# Altium PCB Dimming_IR_VLC.PcbDoc
Units mm, origin at the board's own origin, x right, y up, seen from the top; angles counter-clockwise.
Board outline 48.06 x 54.61 mm, 2 copper layers (Top Layer, Bottom Layer); 43 components, 43 nets, 179 pads, 19 vias.
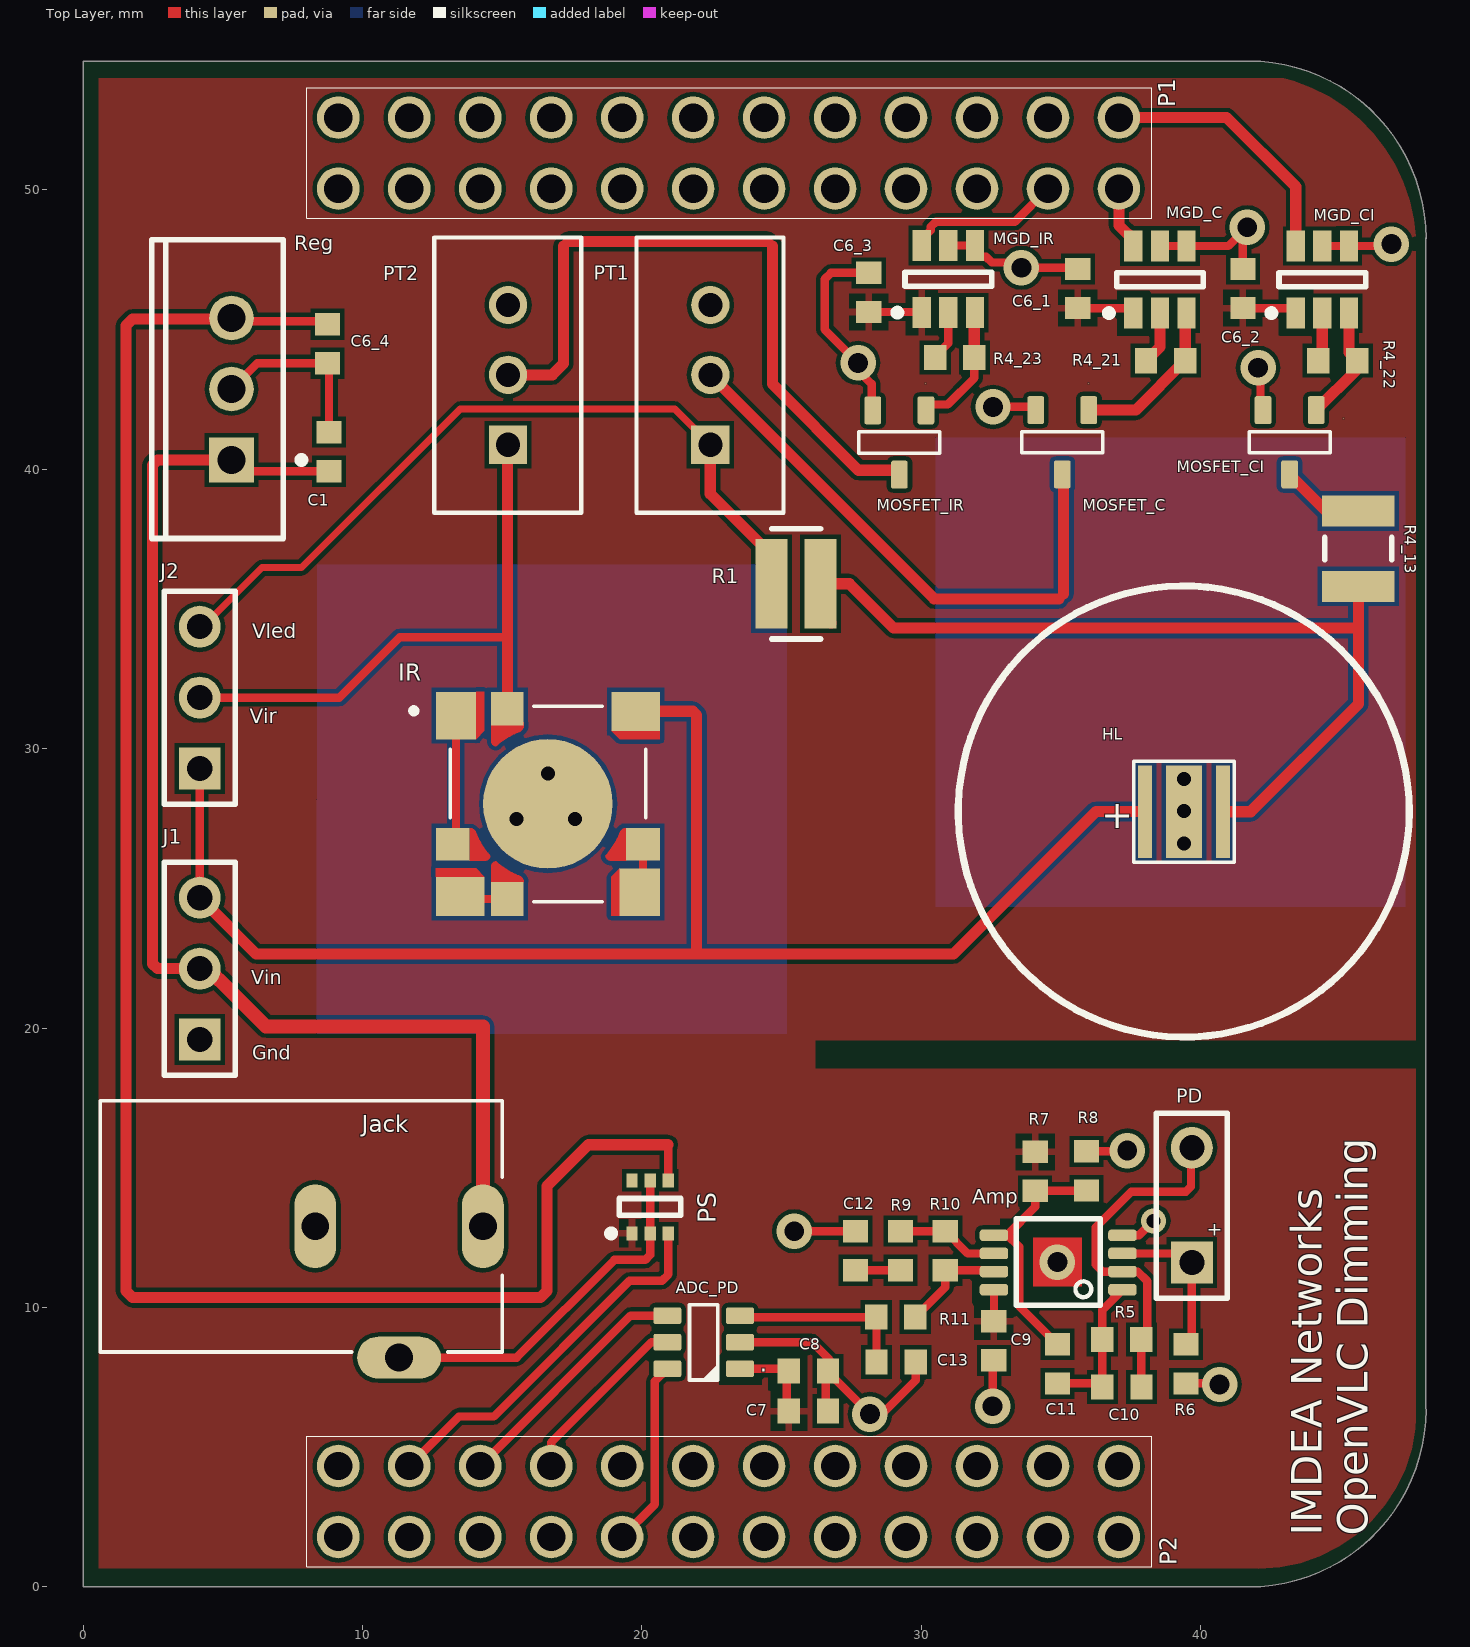
[diagram p0: Top Layer view]
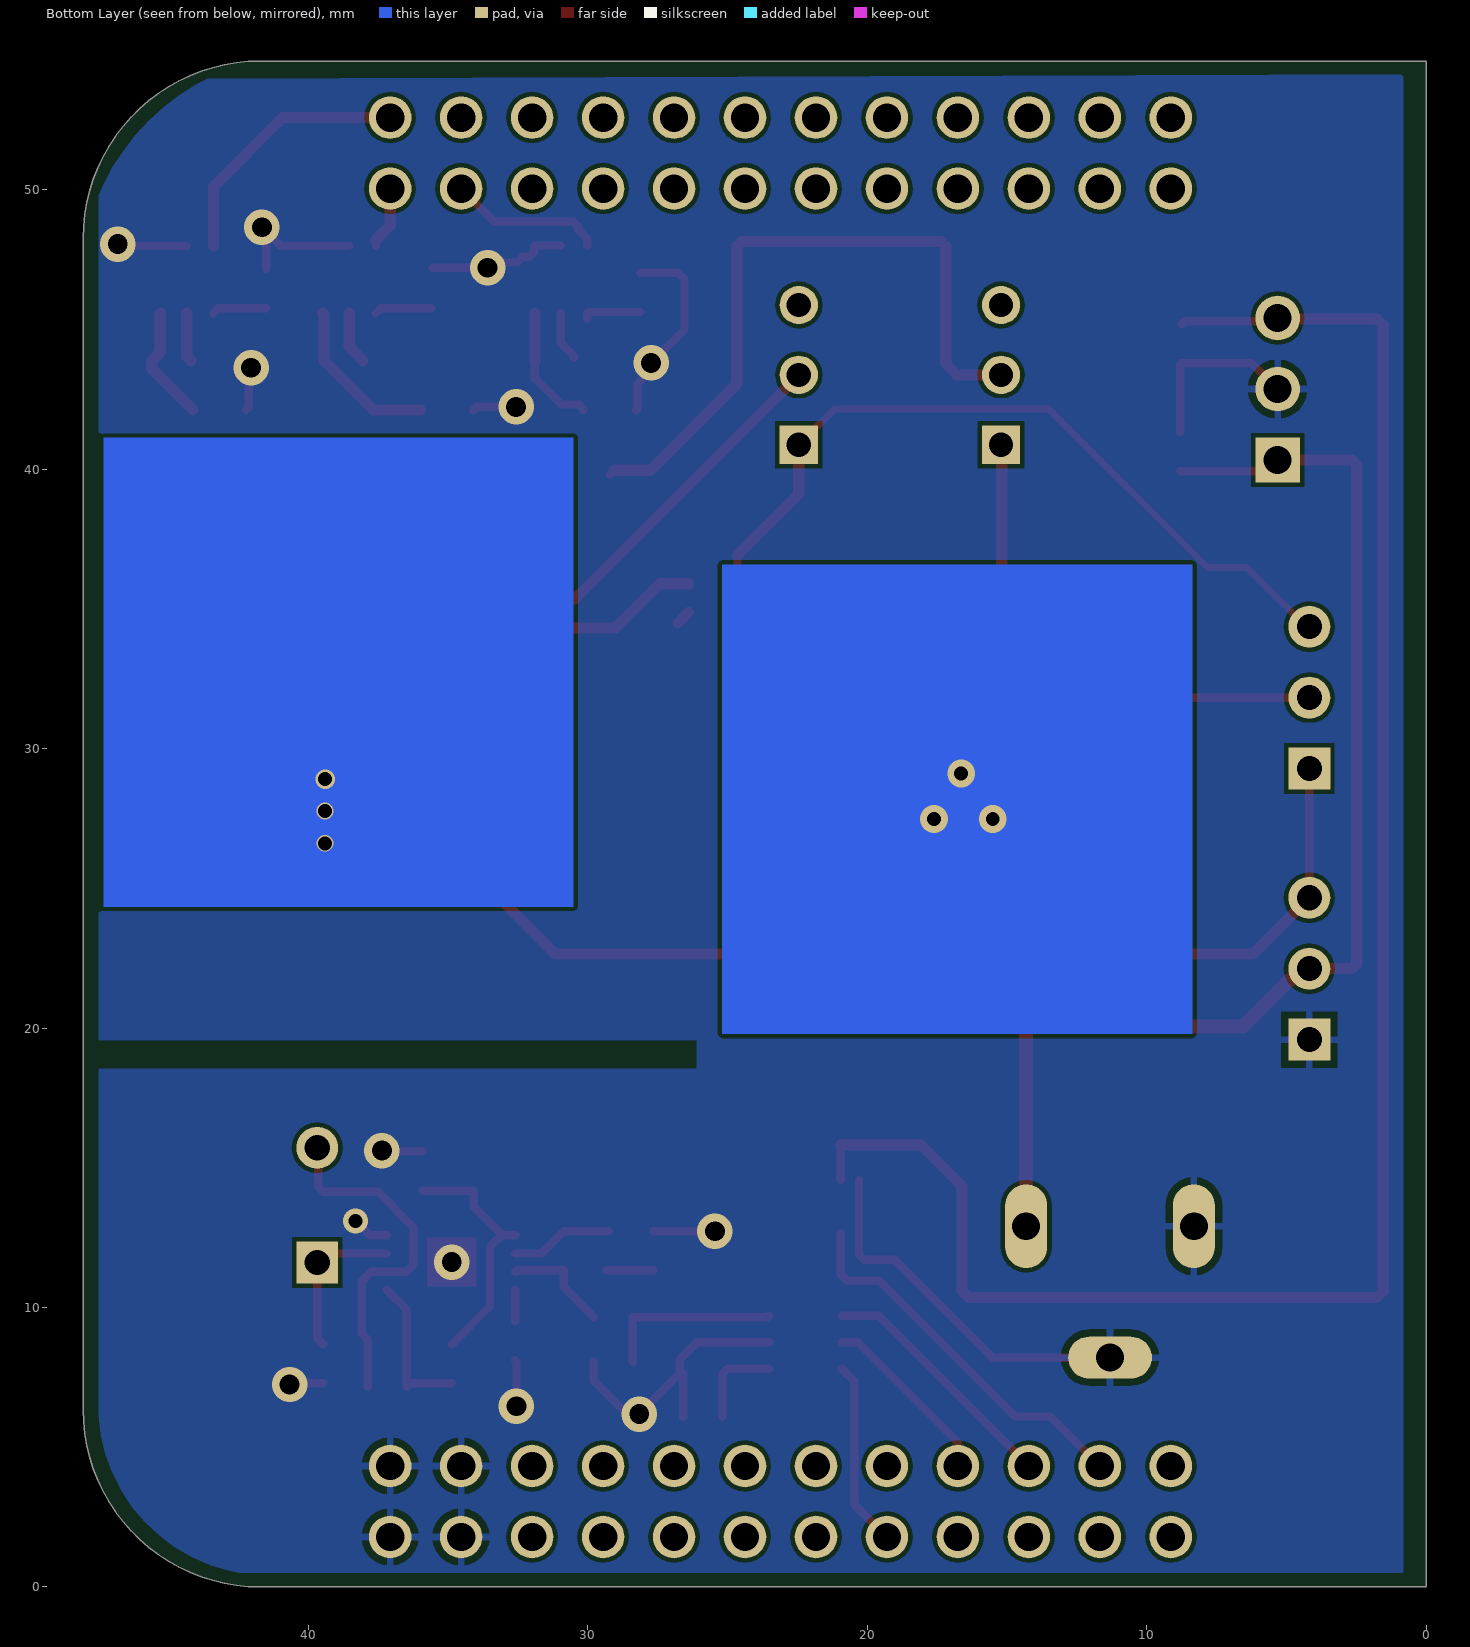
[diagram p1: Bottom Layer view, seen from below]

## Layer stack, top to bottom
Top Solder: solder mask 0.0102, Solder Resist, Dk 3.5
Top Layer: signal copper 0.0356
Dielectric1: dielectric 0.32, FR-4, Dk 4.8
Bottom Layer: signal copper 0.0356
Bottom Solder: solder mask 0.0102, Solder Resist, Dk 3.5

## Board outline
0.002,-0.003 0.002,54.607 41.716,54.607 cw(c41.716,48.257) 48.066,48.257 48.065,48.292 48.065,6.382 48.066,6.347 cw(c41.716,6.347) 41.716,-0.003

## Design rules (kind name [scope] priority, off if disabled: settings)
Clearance Clearance_1 [(InNet('GND') AND InComponent('DC-DC'))] p1: gap=0.5 ignorepadtopadclearanceinfootprint=TRUE except(0: Arc-Hole Track-Hole SMDPad-Hole THPad-Hole Via-Hole Fill-Hole Poly-Hole Region-Hole Text-Hole)
Clearance [All] p2: gap=0.15 ignorepadtopadclearanceinfootprint=FALSE except(0: Arc-Hole Track-Hole SMDPad-Hole THPad-Hole Via-Hole Fill-Hole Poly-Hole Region-Hole Text-Hole)
DiffPairsRouting [All] p1: maxlimit=0.3 minlimit=0.3 mostfreqgap=0.3 toplayer_minwidth=0.381 toplayer_maxwidth=0.381 toplayer_prefwidth=0.381 bottomlayer_minwidth=0.381 bottomlayer_maxwidth=0.381 bottomlayer_prefwidth=0.381 maxuncoupledlength=12.7
HoleSize [All] p1: absolutevalues=TRUE maxlimit=2.54 minlimit=0.25 maxpercent=80.000 minpercent=20.000
HoleToHoleClearance [All] p1: gap=0.1 allowstackedmicrovias=TRUE
MinimumSolderMaskSliver [All] p1: minsoldermaskwidth=0.02
PolygonConnect PolygonConnect_1 [IsVia & InNet('GND')] p1: connectstyle=Direct reliefconductorwidth=0.254 reliefentries=4 polygonreliefangle="90 Angle" airgapwidth=0
PolygonConnect [All] p2: connectstyle=Relief reliefconductorwidth=0.254 reliefentries=4 polygonreliefangle="90 Angle" airgapwidth=0.254
RoutingVias [All] p1: holewidth=0.711 width=1.27 viastyle="Through Hole" minholewidth=25 minwidth=0.55 maxholewidth=0.711 maxwidth=1.27
SMDNeckDown [All] p1: percent=80.000
SilkToSilkClearance [All] p1: silktosilkclearance=0.15
SilkToSolderMaskClearance [IsPad] p1: minsilkscreentomaskgap=0.05 clearancetoexposedcopper=TRUE
SolderMaskExpansion [All] p1: expansion=0.102 istentingtop=FALSE
Width [All] p1: maxlimit=0.5 minlimit=0.15 preferedwidth=0.3 minimp=50.000000 maximp=50.000000 favimp=50.000000
24 further rules are at their usual default settings.

## Classes and differential pairs
component class OpenVLC_1.3.7: ADC_PD Amp C7 C8 C10 C11 HL Jack MOSFET_C PT1 PT2 R5 R6 R7 R10 R11

## Components (designator, comment, footprint, x,y, rotation, side; value= is the part's Value field where it differs from the comment)
ADC_PD "ADC_PD" SOT23-6 22.214,8.756 r180 top
Amp "LTC6269-10" MSOP8 34.903,11.607 r180 top (schematic designator LTC6269-11)
C1 "Cap" 1608[0603] 8.806,40.628 r90 top
C6_1 "Cap" 1608[0603] 35.603,46.467 r90 top (schematic designator C6_2)
C6_2 "Cap" 1608[0603] 41.51,46.467 r90 top (schematic designator C6_1)
C6_3 "Cap" 1608[0603] 28.121,46.327 r90 top
C6_4 "Cap" 1608[0603] 8.752,44.488 r90 top
C7 "Cap" 1608[0603] 25.964,6.29 r0 top
C8 "Cap" 1608[0603] 25.964,7.721 r0 top
C9 "Cap" 1608[0603] 32.598,8.805 r90 top
C10 "Cap" 1608[0603] 37.184,7.153 r180 top
C11 "Cap" 1608[0603] 34.872,7.98 r90 top
C12 "Cap" 1608[0603] 27.652,12.03 r270 top (schematic designator C13)
C13 "Cap" 1608[0603] 29.1,8.052 r0 top
HL "High Power LED" LEDM345X345X226 39.405,27.74 r0 top
IR "Comment" LED_LZ4-04MDCA-0000 16.639,28.023 r0 top locked
J1 "Comment" HDR1X3 4.179,19.584 r90 top
J2 "Comment" HDR1X3 4.179,29.285 r90 top
Jack "2.0 mm Center Pin, 2.5 A, Right Angle, Through Hole, Tapered Pins, Dc Power Jack Connector" CUI_PJ-102A 11.312,12.904 r90 top (schematic designator J1)
MGD_C "LM5114B" SOT23-6_N 38.54,46.787 r90 top (schematic designator MGD_CI)
MGD_CI "LM5114B" SOT23-6_N 44.355,46.787 r90 top (schematic designator MGD_C)
MGD_IR "LM5114B" SOT23-6_N 30.969,46.805 r90 top
MOSFET_C "MOSFET" SOT23-3 35.049,40.965 r270 top (schematic designator MOSFET_CI)
MOSFET_CI "MOSFET" SOT23-3 43.184,40.965 r270 top (schematic designator MOSFET_C)
MOSFET_IR "MOSFET" SOT23-3 29.217,40.956 r270 top
P1 "BBB_P8_reduced" BBB_CAPE_NO_HEADER_R_24 -18.804,50.044 r180 top
P2 "BBB_P9_reduced" BBB_CAPE_NO_HEADER_R_24 -18.804,1.784 r180 top
PS "Comment" ONSC-SOT-363-6-419B-02_W_V 20.299,13.599 r90 top
PT1 "Comment" POT_PV36W_MUR 22.451,40.876 r90 top
PT2 "Comment" POT_PV36W_MUR 15.213,40.876 r90 top
R1 "Comment" FP-LTR18-MFG 25.52,35.897 r0 top
R4_13 "Res3" 14-1210 45.645,37.156 r90 top
R4_21 "Res1" 1608[0603] 38.747,43.882 r180 top (schematic designator R4_22)
R4_22 "Res1" 1608[0603] 44.908,43.882 r180 top (schematic designator R4_21)
R4_23 "Res1" 1608[0603] 31.203,43.996 r180 top
R5 "Res1" 1608[0603] 37.18,8.856 r180 top
R6 "Res1" 1608[0603] 39.472,7.98 r90 top
R7 "Res1" 1608[0603] 34.079,14.87 r90 top
R8 "Res1" 1608[0603] 35.918,14.885 r270 top
R9 "Res1" 1608[0603] 29.257,12.03 r270 top
R10 "Res1" 1608[0603] 30.861,12.03 r90 top
R11 "Res1" 1608[0603] 29.09,9.654 r0 top
Reg "Comment" NDE0003A 5.314,42.869 r90 top

## Footprints (in the part's own frame and the unit in brackets; to place one, negate y for a bottom-side part, rotate by r counter-clockwise, add the part's x,y. Pads: shape width x height; smd on the part's side, far side on the other; paste and mask are expansions set on the pad)
14-1210 [mm] "Chip Resistor, Body 3.2x2.5mm, IPC High Density"
  rect 1.1x2.6 smd: 1(-1.35,0) 2(1.35,0)
  silkscreen extent -0.4,-1.2 0.4,1.2, body extent -1.68,-1.32 1.68,1.32, height 0.9
1608[0603] [mm] "Chip Capacitor, Body 1.6x0.8mm, IPC High Density"
  rect 0.8x0.9 smd: 1(-0.7,0) 2(0.7,0)
  body extent -0.87,-0.48 0.87,0.48, height 1.3
BBB_CAPE_NO_HEADER_R_24 [mil] "46-pin male header for BeagleBone Black P8,P9"
  round 60 hole 40: 23(-1100,0) 24(-1100,-100) 25(-1200,0) 26(-1200,-100) 27(-1300,0) 28(-1300,-100) 29(-1400,0) 30(-1400,-100) 31(-1500,0) 32(-1500,-100) 33(-1600,0) 34(-1600,-100) 35(-1700,0) 36(-1700,-100) 37(-1800,0) 38(-1800,-100) 39(-1900,0) 40(-1900,-100) 41(-2000,0) 42(-2000,-100) 43(-2100,0) 44(-2100,-100) 45(-2200,0) 46(-2200,-100)
  silkscreen extent -2246,-142 -1056,42
CUI_PJ-102A [mm]
  oval 3x1.5 hole 1: 1(0,-3) 2(0,3)
  oval 1.5x3 hole 1: 3(-4.7,0)
  silkscreen extent -4.5,-3.7 4.5,10.7
FP-LTR18-MFG [mm]
  rect 1.15x3.2 smd paste+0 mask+0: 1(-0.875,0) 2(0.875,0)
  silkscreen extent -0.87,-1.97 0.87,1.97, body extent -1.55,-1.78 1.55,1.78, height 0.25
HDR1X3 [mm] "Connector; Header; 3 Position"
  rect 1.5x1.5 hole 0.9: 1(0,0)
  round 1.5 hole 0.9: 2(2.54,0) 3(5.08,0)
  silkscreen extent -1.27,-1.27 6.35,1.27
LED_LZ4-04MDCA-0000 [mm]
  rect 1.44x1.7 smd paste-2 mask+0: 1(-3.29,3.16) 5(3.29,-3.16)
  rect 1.16x1.21 smd paste-2 mask+0: 2(-1.45,3.405) 6(-1.45,-3.405)
  rect 1.74x1.4 smd paste-2 mask+0: 3(3.14,3.31) 7(-3.14,-3.31)
  rect 1.21x1.16 smd paste-2 mask+0: 4(3.405,-1.45) 8(-3.405,-1.45)
  round 4.64 smd mask+0.23: 9(0,0)
  Top Layer region: -2.27,-2.61 -4.01,-2.61 -4.01,-2.31 -2.57,-2.31
  Top Layer region: -2.732,-0.873 -2.724,-0.876 -2.716,-0.88 -2.708,-0.884 -2.7,-0.888 -2.692,-0.892 -2.685,-0.897 -2.678,-0.901 -2.67,-0.906 -2.663,-0.911 -2.656,-0.917 -2.649,-0.922 -2.643,-0.928 -2.636,-0.934 -2.63,-0.94 -2.624,-0.946 -2.618,-0.953 -2.612,-0.959 -2.607,-0.966 -2.601,-0.973 -2.596,-0.98 -2.591,-0.988 -2.587,-0.995 -2.582,-1.002 -2.578,-1.01 -2.574,-1.018 -2.57,-1.026 -2.566,-1.034 -2.563,-1.042 -2.56,-1.05 -2.548,-1.079 -2.536,-1.108 -2.523,-1.137 -2.51,-1.166 -2.497,-1.194 -2.483,-1.223 -2.469,-1.251 -2.455,-1.279 -2.44,-1.307 -2.425,-1.335 -2.41,-1.363 -2.394,-1.39 -2.378,-1.418 -2.362,-1.445 -2.345,-1.472 -2.328,-1.498 -2.311,-1.525 -2.293,-1.551 -2.276,-1.577 -2.258,-1.603 -2.239,-1.629 -2.22,-1.654 -2.201,-1.68 -2.182,-1.705 -2.162,-1.729 -2.143,-1.754 -2.122,-1.778 -2.102,-1.802 -2.081,-1.826 -2.06,-1.85 -2.06,-1.859 -2.061,-1.869 -2.062,-1.878 -2.064,-1.887 -2.066,-1.897 -2.069,-1.906 -2.072,-1.915 -2.076,-1.923 -2.08,-1.932 -2.084,-1.94 -2.089,-1.948 -2.094,-1.956 -2.1,-1.963 -2.106,-1.97 -2.113,-1.977 -2.12,-1.984 -2.127,-1.99 -2.134,-1.996 -2.142,-2.001 -2.15,-2.006 -2.158,-2.01 -2.167,-2.014 -2.175,-2.018 -2.184,-2.021 -2.193,-2.024 -2.203,-2.026 -2.212,-2.028 -2.221,-2.029 -2.231,-2.03 -2.24,-2.03 -2.8,-2.03 -2.8,-0.87 -2.74,-0.87
  Top Layer region: -2.27,2.61 -2.57,2.31 -2.57,4.01 -2.27,4.01
  Top Layer region: 2.57,-4.01 2.27,-4.01 2.27,-2.61 2.57,-2.31
  Top Layer region: -1.826,-2.081 -1.802,-2.102 -1.778,-2.122 -1.754,-2.143 -1.729,-2.162 -1.705,-2.182 -1.68,-2.201 -1.654,-2.22 -1.629,-2.239 -1.603,-2.258 -1.577,-2.276 -1.551,-2.293 -1.525,-2.311 -1.498,-2.328 -1.472,-2.345 -1.445,-2.362 -1.418,-2.378 -1.39,-2.394 -1.363,-2.41 -1.335,-2.425 -1.307,-2.44 -1.279,-2.455 -1.251,-2.469 -1.223,-2.483 -1.194,-2.497 -1.166,-2.51 -1.137,-2.523 -1.108,-2.536 -1.079,-2.548 -1.05,-2.56 -1.042,-2.563 -1.034,-2.566 -1.026,-2.57 -1.018,-2.574 -1.01,-2.578 -1.002,-2.582 -0.995,-2.587 -0.988,-2.591 -0.98,-2.596 -0.973,-2.601 -0.966,-2.607 -0.959,-2.612 -0.953,-2.618 -0.946,-2.624 -0.94,-2.63 -0.934,-2.636 -0.928,-2.643 -0.922,-2.649 -0.917,-2.656 -0.911,-2.663 -0.906,-2.67 -0.901,-2.678 -0.897,-2.685 -0.892,-2.692 -0.888,-2.7 -0.884,-2.708 -0.88,-2.716 -0.876,-2.724 -0.873,-2.732 -0.87,-2.74 -0.87,-2.8 -2.03,-2.8 -2.03,-2.24 -2.03,-2.231 -2.029,-2.221 -2.028,-2.212 -2.026,-2.203 -2.024,-2.193 -2.021,-2.184 -2.018,-2.175 -2.014,-2.167 -2.01,-2.158 -2.006,-2.15 -2.001,-2.142 -1.996,-2.134 -1.99,-2.127 -1.984,-2.12 -1.977,-2.113 -1.97,-2.106 -1.963,-2.1 -1.956,-2.094 -1.948,-2.089 -1.94,-2.084 -1.932,-2.08 -1.923,-2.076 -1.915,-2.072 -1.906,-2.069 -1.897,-2.066 -1.887,-2.064 -1.878,-2.062 -1.869,-2.061 -1.859,-2.06 -1.85,-2.06
  Top Layer region: -0.87,2.74 -0.873,2.732 -0.876,2.724 -0.88,2.716 -0.884,2.708 -0.888,2.7 -0.892,2.692 -0.897,2.685 -0.901,2.678 -0.906,2.67 -0.911,2.663 -0.917,2.656 -0.922,2.649 -0.928,2.643 -0.934,2.636 -0.94,2.63 -0.946,2.624 -0.953,2.618 -0.959,2.612 -0.966,2.607 -0.973,2.601 -0.98,2.596 -0.988,2.591 -0.995,2.587 -1.002,2.582 -1.01,2.578 -1.018,2.574 -1.026,2.57 -1.034,2.566 -1.042,2.563 -1.05,2.56 -1.079,2.548 -1.108,2.536 -1.137,2.523 -1.166,2.51 -1.194,2.497 -1.223,2.483 -1.251,2.469 -1.279,2.455 -1.307,2.44 -1.335,2.425 -1.363,2.41 -1.39,2.394 -1.418,2.378 -1.445,2.362 -1.472,2.345 -1.498,2.328 -1.525,2.311 -1.551,2.293 -1.577,2.276 -1.603,2.258 -1.629,2.239 -1.654,2.22 -1.68,2.201 -1.705,2.182 -1.729,2.162 -1.754,2.143 -1.778,2.122 -1.802,2.102 -1.826,2.081 -1.85,2.06 -1.859,2.06 -1.869,2.061 -1.878,2.062 -1.887,2.064 -1.897,2.066 -1.906,2.069 -1.915,2.072 -1.923,2.076 -1.932,2.08 -1.94,2.084 -1.948,2.089 -1.956,2.094 -1.963,2.1 -1.97,2.106 -1.977,2.113 -1.984,2.12 -1.99,2.127 -1.996,2.134 -2.001,2.142 -2.006,2.15 -2.01,2.158 -2.014,2.167 -2.018,2.175 -2.021,2.184 -2.024,2.193 -2.026,2.203 -2.028,2.212 -2.029,2.221 -2.03,2.231 -2.03,2.24 -2.03,2.921 -0.87,2.921
  Top Layer region: 2.8,-2.03 2.24,-2.03 2.231,-2.03 2.221,-2.029 2.212,-2.028 2.203,-2.026 2.193,-2.024 2.184,-2.021 2.175,-2.018 2.167,-2.014 2.158,-2.01 2.15,-2.006 2.142,-2.001 2.134,-1.996 2.127,-1.99 2.12,-1.984 2.113,-1.977 2.106,-1.97 2.1,-1.963 2.094,-1.956 2.089,-1.948 2.084,-1.94 2.08,-1.932 2.076,-1.923 2.072,-1.915 2.069,-1.906 2.066,-1.897 2.064,-1.887 2.062,-1.878 2.061,-1.869 2.06,-1.859 2.06,-1.85 2.081,-1.826 2.102,-1.802 2.122,-1.778 2.143,-1.754 2.162,-1.729 2.182,-1.705 2.201,-1.68 2.22,-1.654 2.239,-1.629 2.258,-1.603 2.276,-1.577 2.293,-1.551 2.311,-1.525 2.328,-1.498 2.345,-1.472 2.362,-1.445 2.378,-1.418 2.394,-1.39 2.41,-1.363 2.425,-1.335 2.44,-1.307 2.455,-1.279 2.469,-1.251 2.483,-1.223 2.497,-1.194 2.51,-1.166 2.523,-1.137 2.536,-1.108 2.548,-1.079 2.56,-1.05 2.563,-1.042 2.566,-1.034 2.57,-1.026 2.574,-1.018 2.578,-1.01 2.582,-1.002 2.587,-0.995 2.591,-0.988 2.596,-0.98 2.601,-0.973 2.607,-0.966 2.612,-0.959 2.618,-0.953 2.624,-0.946 2.63,-0.94 2.636,-0.934 2.643,-0.928 2.649,-0.922 2.656,-0.917 2.663,-0.911 2.67,-0.906 2.678,-0.901 2.685,-0.897 2.692,-0.892 2.7,-0.888 2.708,-0.884 2.716,-0.88 2.724,-0.876 2.732,-0.873 2.74,-0.87 2.8,-0.87
  Top Layer region: 4.01,2.31 2.57,2.31 2.27,2.61 4.01,2.61
  silkscreen extent -4.9,-3.5 3.5,3.5
LEDM345X345X226 [mm]
  rect 0.5x3.3 smd: 1(-1.4,0) 2(1.4,0)
  rect 1.3x3.3 smd: 3(0,0)
  silkscreen extent -1.8,-1.8 1.8,1.8
MSOP8 [mm]
  rrect50% 1.02x0.41 smd: 1(-2.3,0.975) 2(-2.3,0.325) 3(-2.3,-0.325) 4(-2.3,-0.975) 5(2.3,-0.975) 6(2.3,-0.325) 7(2.3,0.325) 8(2.3,0.975)
  silkscreen extent -1.5,-1.56 1.5,1.53, body extent -2.46,-1.49 2.44,1.51, height 1.15
NDE0003A [mm] "FM, 3-Leads, Body 10.7x4.7mm, Pitch 2.54mm"
  rect 1.6x1.6 hole 1: 1(-2.54,0)
  round 1.6 hole 1: 2(0,0) 3(2.54,0)
  silkscreen extent -5.35,-2.63 5.35,2.85, body extent -5.4,-1.9 5.4,2.9, height 19.4
ONSC-SOT-363-6-419B-02_W_V [mm] "SOT23, 6-Leads, Body 2x1.25mm, Pitch 0.65mm"
  rect 0.5x0.4 smd: 1(-0.95,0.65) 2(-0.95,0) 3(-0.95,-0.65) 4(0.95,-0.65) 5(0.95,0) 6(0.95,0.65)
  silkscreen extent -1.07,-1.1 0.3,1.52, body extent -0.63,-1 0.63,1, height 1.1
POT_PV36W_MUR [mil]
  rect 54x54 hole 34 mask+0: 1(0,0)
  round 54 hole 34 mask+0: 2(98.43,0) 3(196.85,0)
  silkscreen extent -96,-103 292,104, body extent -79,-98 299,99, height 377
SOT23-3 [mm] "SOT23, 3 pin"
  round 0.5 on Mech15: 0(0,0)
  rrect25% 1x0.6 smd: 1(-1.15,0.95) 2(-1.15,-0.95) 3(1.15,0)
  silkscreen extent -0.38,-1.45 0.38,1.45, body extent -1.4,-1.45 1.4,1.45, height 1.29
SOT23-6 [mm]
  round 0.5 on Mech15: 0(0,0)
  rrect25% 1x0.6 smd: 1(-1.3,0.95) 2(-1.3,0) 3(-1.3,-0.95) 4(1.3,-0.95) 5(1.3,0) 6(1.3,0.95)
  silkscreen extent -0.51,-1.35 0.51,1.35, body extent -1.4,-1.45 1.4,1.45, height 1.44
SOT23-6_N [mm] "SOT23, 6-Leads, Body 2.9x1.6mm, Pitch 0.95mm, Lead Span 2.7mm, IPC Medium Density"
  rect 1.1x0.65 smd: 1(-1.2,0.95) 2(-1.2,0) 3(-1.2,-0.95) 4(1.2,-0.95) 5(1.2,0) 6(1.2,0.95)
  silkscreen extent -1.32,-1.55 0.25,1.95, body extent -0.9,-1.55 0.9,1.55, height 1.45

## Part data
ADC_PD: library part ADS7883
C1 C6_1 C6_2 C6_3 C6_4 C7 C8 C9 C10 C11 C12 C13: "Capacitor"
HL: library part LED1, "Typical RED GaAs LED"
Jack: library part PJ-102A
MGD_C MGD_CI MGD_IR: "MOSFET Gate Driver"
MOSFET_C MOSFET_CI MOSFET_IR: library part MOSFET-P, "P-Channel MOSFET"
R4_13 R4_21 R4_22 R4_23 R5 R6 R7 R8 R9 R10 R11: "Resistor"

## Free pads (board coordinates)
  rect 1.5x1.5 hole 0.9: 1(39.685,11.605)
  round 1.5 hole 0.9: 2(39.685,15.712)

## Via types
v1: diameter 1.27, hole 0.711, Top Layer to Bottom Layer, 12 vias
v2: diameter 1, hole 0.5, Top Layer to Bottom Layer, 3 vias
v3: diameter 0.6, hole 0.5, Top Layer to Bottom Layer, 2 vias
v4: diameter 0.7, hole 0.5, Top Layer to Bottom Layer, 1 vias
v5: diameter 0.9, hole 0.5, Top Layer to Bottom Layer, 1 vias

## Nets (pads, with @x,y where several pads share a name; then routed paths per layer and width w, separated by ;. In a path a pad name is that pad's centre, name@x,y a point inside that pad or via, vN(x,y) a via of type N, cw(c..) or ccw(c..) an arc to the next point about the centre after c; other vN are vias at no path point)
CI_1: MGD_IR.3 MOSFET_IR.1 R4_23.1 | length 4.7
  Top Layer w0.3: MOSFET_IR.1 30.167,42.164 30.317,42.314 30.949,42.314 31.903,43.267 R4_23.1 ; MGD_IR.3@31.898,45.583 MGD_IR.3
  Top Layer w0.4: R4_23.1@31.898,43.872 MGD_IR.3@31.898,45.583
CI_2: MGD_IR.2 R4_23.2 | length 1.8
  Top Layer w0.3: R4_23.2 30.503,44.046 30.969,44.512 MGD_IR.2
CI_3: MOSFET_IR.3 PT2.2 | length 24.8
  Top Layer w0.3: 17.194,47.977 17.37,48.153 ; 24.496,48.153 24.672,47.977 ; MOSFET_IR.3@29.067,39.959 29.217,39.809 MOSFET_IR.3
  Top Layer w0.4: PT2.2 16.793,43.376 17.194,43.778 17.194,47.977 ; 17.37,48.153 24.496,48.153 ; 24.672,47.977 24.672,43.044 27.757,39.959 MOSFET_IR.3@29.067,39.959
CS_PD: ADC_PD.6 P2.31 | length 6.7
  Top Layer w0.3: P2.31@19.297,1.784 20.469,2.956 20.469,7.361 ADC_PD.6
GND: ADC_PD.2 Amp.4 C1.2 C6_1.2 C6_2.2 C6_3.2 C6_4.1 C7.2 C8.2 C9.1 C12.1 C13.2 J1.1 Jack.2 Jack.3 MGD_C.4 MGD_C.5 MGD_CI.4 MGD_CI.5 MGD_IR.4 MGD_IR.5 MOSFET_C.2 MOSFET_CI.2 MOSFET_IR.2 P2.43 P2.44 P2.45 P2.46 PS.2 PS.5 R6.1 R8.1 Reg.2 | length 60.2
  Top Layer w0.3: Reg.2 6.233,43.788 C6_4.1 8.806,43.735 C1.2 ; Jack.3 15.521,8.204 19.017,11.7 20.123,11.7 20.299,11.876 PS.2 PS.5 ; ADC_PD.2 26.087,8.756 26.713,8.129 26.713,7.752 26.673,7.712 C8.2@26.664,7.703 ; v1(25.454,12.725) 27.648,12.725 C12.1@27.652,12.721 ; C7.2@26.584,6.09 26.584,7.623 C8.2@26.664,7.703 ; C8.2 C8.2@26.664,7.703 ; C6_3.2 26.768,47.027 26.54,46.799 26.54,45.004 v1(27.739,43.806) 27.739,43.543 28.226,43.055 28.226,42.147 MOSFET_IR.2 ; C13.2 29.8,7.387 28.596,6.183 v1(28.164,6.183) 26.664,7.682 C8.2@26.664,7.703 ; MGD_IR.5 MGD_IR.4 31.919,47.78 32.094,47.605 32.319,47.605 32.528,47.396 33.403,47.396 v1(33.588,47.21) C6_1.2@35.559,47.21 ; v1(32.557,6.465) 32.557,8.063 C9.1 ; v1(32.569,42.229) 33.985,42.229 MOSFET_C.2 ; R8.1 37.346,15.585 v1(37.375,15.614) ; Amp.4 37.795,12.582 v5(38.311,13.098) ; MGD_C.5 MGD_C.4 40.994,47.987 41.51,48.503 C6_2.2 ; R6.1 40.638,7.28 v1(40.676,7.241) ; v1(42.054,43.63) 42.144,43.54 42.144,42.205 MOSFET_CI.2 ; MGD_CI.5 MGD_CI.4 46.759,47.987 v1(46.825,48.053)
  other v1: 34.871,11.623 41.668,48.661
IR_1: IR.4 IR.5 | length 1.8
  Top Layer w0.3: IR.5 20.044,24.978 IR.4
IR_2: IR.6 IR.7 | length 1.7
  Top Layer w0.3: IR.7 13.594,24.618 IR.6
IR_3: IR.1 IR.8 | length 4.6
  Top Layer w0.3: IR.8@13.349,26.573 IR.1
IR_4: 
IR_N: IR.2 J2.2 PT2.1 | length 21.4
  Top Layer w0.3: J2.2 9.176,31.825 11.334,33.982 15.132,33.982 15.189,33.925 ; 15.189,36.423 15.223,36.457 ; PT2.1@15.189,40.852 PT2.1
  Top Layer w0.4: IR.2 15.189,33.925 15.189,36.423 PT2.1@15.189,40.852
IR_P: 
MISO_PD: ADC_PD.5 P2.30 | length 6.5
  Top Layer w0.3: P2.30@16.757,4.324 16.757,5.164 20.348,8.756 ADC_PD.5
MOSI_PD: ADC_PD.4 P2.28 | length 8.9
  Top Layer w0.3: P2.28@14.217,4.324 19.598,9.706 ADC_PD.4
NetADC_PD_3: ADC_PD.3 C13.1 R11.1 | length 6.5
  Top Layer w0.3: ADC_PD.3 23.566,9.654 R11.1 28.4,9.643 C13.1
NetC3_1: 
NetC4_1: HL.1 IR.3 J1.3 J2.1 | length 52.2
  Top Layer w0.3: J1.3 J2.1 ; 11.455,22.615 11.455,22.649 ; IR.3 19.949,31.333 IR.3@19.951,31.336 ; 21.961,22.641 21.961,22.649 ; HL.1@37.997,27.749 HL.1
  Top Layer w0.4: J1.3 6.194,22.649 11.455,22.649 21.961,22.649 ; IR.3@19.951,31.336 21.823,31.336 21.961,31.198 21.961,22.649 ; HL.1@37.997,27.749 36.252,27.749 31.152,22.649 21.961,22.649
NetC10_1: Amp.2 C10.1 pad.2 R5.1 | length 12.7
  Top Layer w0.3: C10.1 37.88,7.157 R5.1 38.092,9.068 38.092,10.937 37.748,11.282 Amp.2 36.493,11.282 36.24,11.534 36.24,12.867 37.518,14.145 39.477,14.145 39.653,14.321 39.653,15.68 pad.2
NetC10_2: Amp.1 C10.2 C11.1 R5.2 | length 5.4
  Top Layer w0.3: C11.1 36.358,7.28 C10.2@36.48,7.157 ; C10.2 C10.2@36.48,7.157 ; Amp.1 36.48,9.909 R5.2 C10.2@36.48,7.157
NetC11_2: Amp.5 C11.2 R7.1 R8.2 | length 9.4
  Top Layer w0.3: C11.2 33.502,10.05 33.502,12.177 33.097,12.582 Amp.5 33.063,12.582 34.079,13.598 R7.1 35.902,14.17 R8.2
NetC12_2: C12.2 R9.2 | length 1.7
  Top Layer w0.3: C12.2 R9.2 29.311,11.33 29.321,11.321 R9.2@29.33,11.33
NetD1_A: 
NetDC-DC_1: 
NetDC-DC_2: 
NetHL_2: HL.2 R1.2 R4_13.1 | length 31.1
  Top Layer w0.4: R1.2@26.395,34.872 R1.2@26.77,34.497 ; R1.2 27.43,35.897 29.014,34.314 45.645,34.314 ; HL.2 41.793,27.74 45.645,31.593 45.645,34.314 ; R4_13.1 45.645,34.314
NetLTC6269-11_3: Amp.3 pad.1 R6.2 | length 5.6
  Top Layer w0.3: Amp.3 39.358,11.932 pad.1 39.685,8.892 R6.2
NetLTC6269-11_6: Amp.6 R9.1 R10.2 | length 3.7
  Top Layer w0.3: R9.1 R10.2 31.66,11.932 Amp.6
NetLTC6269-11_7: Amp.7 R10.1 R11.2 | length 3.9
  Top Layer w0.3: R11.2 30.861,10.725 R10.1 32.554,11.33 Amp.7
NetMGD_C_2: MGD_C.2 R4_21.2 | length 1.9
  Top Layer w0.4: R4_21.2 38.54,44.376 MGD_C.2
NetMGD_C_3: MGD_C.3 MOSFET_C.1 R4_21.1 | length 5.9
  Top Layer w0.4: MOSFET_C.1 37.68,42.115 R4_21.1 39.447,45.544 MGD_C.3
NetMGD_I_2: MGD_CI.2 R4_22.2 | length 1.8
  Top Layer w0.4: R4_22.2 44.355,44.03 MGD_CI.2
NetMGD_I_3: MGD_CI.3 MOSFET_CI.1 R4_22.1 | length 4.2
  Top Layer w0.4: MOSFET_CI.1 45.608,43.589 R4_22.1 45.305,44.185 MGD_CI.3
NetMOSFET_C_3: MOSFET_C.3 PT1.2 | length 20.3
  Top Layer w0.3: 34.921,35.36 35.097,35.536 ; MOSFET_C.3 MOSFET_C.3@35.097,39.767
  Top Layer w0.4: PT1.2 30.468,35.36 34.921,35.36 ; 35.097,35.536 MOSFET_C.3@35.097,39.767
NetMOSFET_I_3: MOSFET_CI.3 R4_13.2 | length 3
  Top Layer w0.4: MOSFET_CI.3 44.494,38.506 R4_13.2
NetR1: J2.3 PT1.1 R1.1 | length 27.8
  Top Layer w0.25: J2.3@4.296,34.365 6.406,36.475 7.824,36.475 13.496,42.147 21.181,42.147 PT1.1
  Top Layer w0.3: R1.1 R1.1@24.645,36.922
  Top Layer w0.4: PT1.1 22.451,39.116 R1.1@24.645,36.922
P8_43: MGD_IR.6 P1.43 | length 5.6
  Top Layer w0.3: MGD_IR.6 30.019,48.23 30.344,48.555 30.344,48.679 30.52,48.855 33.347,48.855 P1.43
P8_44: P1.44
P8_45: MGD_C.6 P1.45 | length 2.3
  Top Layer w0.3: MGD_C.6 MGD_C.6@37.59,48.212
  Top Layer w0.4: P1.45 37.076,48.726 MGD_C.6@37.59,48.212
P8_46: MGD_CI.6 P1.46 | length 9.5
  Top Layer w0.4: P1.46 40.93,52.584 43.405,50.109 MGD_CI.6
PS12V: C1.1 J1.2 Jack.1 Reg.1 | length 44.3
  Top Layer w0.3: J1.2@3.919,22.124 J1.2 ; Reg.1 5.715,39.928 C1.1
  Top Layer w0.4: J1.2@3.919,22.124 2.661,22.124 2.485,22.3 2.485,40.154 2.661,40.329 Reg.1
  Top Layer w0.5: J1.2 4.449,22.124 4.86,21.713 4.889,21.713 6.551,20.05 14.312,20.05 Jack.1
PS_3: P2.26 PS.3 | length 13.6
  Top Layer w0.3: P2.26 13.45,6.098 14.704,6.098 19.56,10.954 20.721,10.954 20.949,11.181 PS.3
PS_4: C6_4.2 PS.4 Reg.3 | length 67.2
  Top Layer w0.3: Reg.3 5.424,45.299 8.641,45.299 C6_4.2 ; PS.4@20.936,14.561 PS.4 20.949,15.811 20.936,15.823
  Top Layer w0.4: Reg.3 5.277,45.373 1.771,45.373 1.537,45.139 1.537,10.586 1.771,10.352 16.375,10.352 16.61,10.586 16.61,14.343 18.09,15.823 20.936,15.823
T1: 
VCC: ADC_PD.1 Amp.8 C6_1.1 C6_2.1 C6_3.1 C7.1 C8.1 C9.2 MGD_C.1 MGD_CI.1 MGD_IR.1 PS.1 R7.2 | length 10.6
  Top Layer w0.3: ADC_PD.1 25.001,7.806 25.184,7.623 C7.1@25.184,6.09 ; C6_3.1 29.998,45.627 MGD_IR.1 MGD_IR.1@30.019,45.38 ; C9.2 32.603,9.51 Amp.8 ; C6_1.1 37.41,45.767 MGD_C.1 ; C6_2.1 43.225,45.767 MGD_CI.1
pads on no net: ADC_PD.0 HL.3 IR.9 MOSFET_C.0 MOSFET_CI.0 MOSFET_IR.0 P1.23 P1.24 P1.25 P1.26 P1.27 P1.28 P1.29 P1.30 P1.31 P1.32 P1.33 P1.34 P1.35 P1.36 P1.37 P1.38 P1.39 P1.40 P1.41 P1.42 P2.23 P2.24 P2.25 P2.27 P2.29 P2.32 P2.33 P2.34 P2.35 P2.36 P2.37 P2.38 P2.39 P2.40 P2.41 P2.42 PS.6 PT1.3 PT2.3
copper on no net:
  other v2: 15.51,27.483 17.612,27.484 16.638,29.107
  other v3: 39.41,26.61 39.405,27.764
  other v4: 39.405,28.909

## Polygon pours and split planes (outlines as drawn)
GND on Bottom Layer "Ground plane" (solid, pour order 8): 0.819,54.131 0.819,0.505 42.49,0.505 ccw(c41.406,6.512) 47.51,6.512 47.51,49.787 ccw(c39.939,46.653) 43.621,53.973
VCC on Top Layer "Power plane" (solid, pour order 6): 0.56,53.989 0.56,0.659 7.811,0.659 41.716,0.659 ccw(c42.029,6.335) 47.706,6.022 47.706,47.908 ccw(c41.431,47.908) 42.982,53.989

## Other copper
Top Layer:
  pour cut-out: 37.011,46.391 38.166,46.391 38.166,44.783 37.011,44.783
  pour cut-out: 42.799,46.46 44.032,46.46 44.032,44.787 42.799,44.787
  pour cut-out: 48.066,19.567 26.2,19.567 26.2,18.551 48.066,18.551
  pour cut-out: 22.763,8.287 24.283,8.287 24.285,7.237 22.763,7.237
  pour cut-out: 31.832,11.063 33.446,11.063 33.448,10.166 31.832,10.165
  pour cut-out: 24.528,8.339 25.829,8.339 25.831,7.034 24.528,7.034
  pour cut-out: 32.834,13.17 36.952,13.17 36.958,9.904 32.834,9.904
  region net GND: 34.003,12.501 35.751,12.501 35.751,10.753 34.003,10.753
Bottom Layer:
  region: 8.374,19.801 25.184,19.801 25.184,36.579 8.374,36.579
  region: 30.515,24.339 47.325,24.339 47.325,41.117 30.515,41.117
  pour cut-out: 47.942,19.567 26.11,19.567 26.11,18.551 47.942,18.551
  pour cut-out: 48.067,19.567 26.235,19.567 26.235,18.551 48.067,18.551

## Silkscreen, mask and mechanical layers (free items; w line width, h text height)
Top Overlay:
  circle w0.254: c39.395,27.749 r8.073
  lines w0.2: 38.415,10.335 38.415,16.945 40.955,16.945 40.955,10.335 38.415,10.335
  text "Vled" at 6.054,33.946 h0.52
  text "Vir" at 5.97,30.906 h0.52
  text "Vin" at 6.019,21.565 h0.5
  text "Gnd" at 6.048,18.86 h0.5
  text "PD" at 39.128,17.32 h0.5
  text "+" at 40.227,12.563 h0.5
  text "IMDEA Networks  / OpenVLC Dimming" at 45.989,1.834 h1.1 r90
Mechanical 1:
  lines w0.254: 48.066,6.347 cw(c41.716,6.347) 41.716,-0.003 0.002,-0.003 0.002,54.607 41.716,54.607 cw(c41.716,48.257) 48.066,48.257 ; 48.065,6.382 48.065,48.292
Mechanical 15:
  lines w0.1: 27.777,30.118 28.727,30.118 ; 28.252,29.643 28.252,30.593 ; 27.702,28.918 28.802,28.918 28.802,31.318 27.702,31.318 27.702,28.918

## Text inside footprints (layer, text, board x,y; h text height)
HL: Top Overlay "+" at 36.44,27.147 h1